# Altium PCB PiMX8MP_r0.3.PcbDoc (part 7 of 10)
Units mm, origin at the board's own origin, x right, y up, seen from the top; angles counter-clockwise.
Board outline 55 x 40 mm, 10 copper layers (Top Layer, Layer 1, Layer 2, Layer 3, Layer 4, Layer 5, Layer 6, Layer 7, Layer 8, Bottom Layer), stack 1.472 mm thick; 545 components, 477 nets, 2606 pads, 2278 vias.
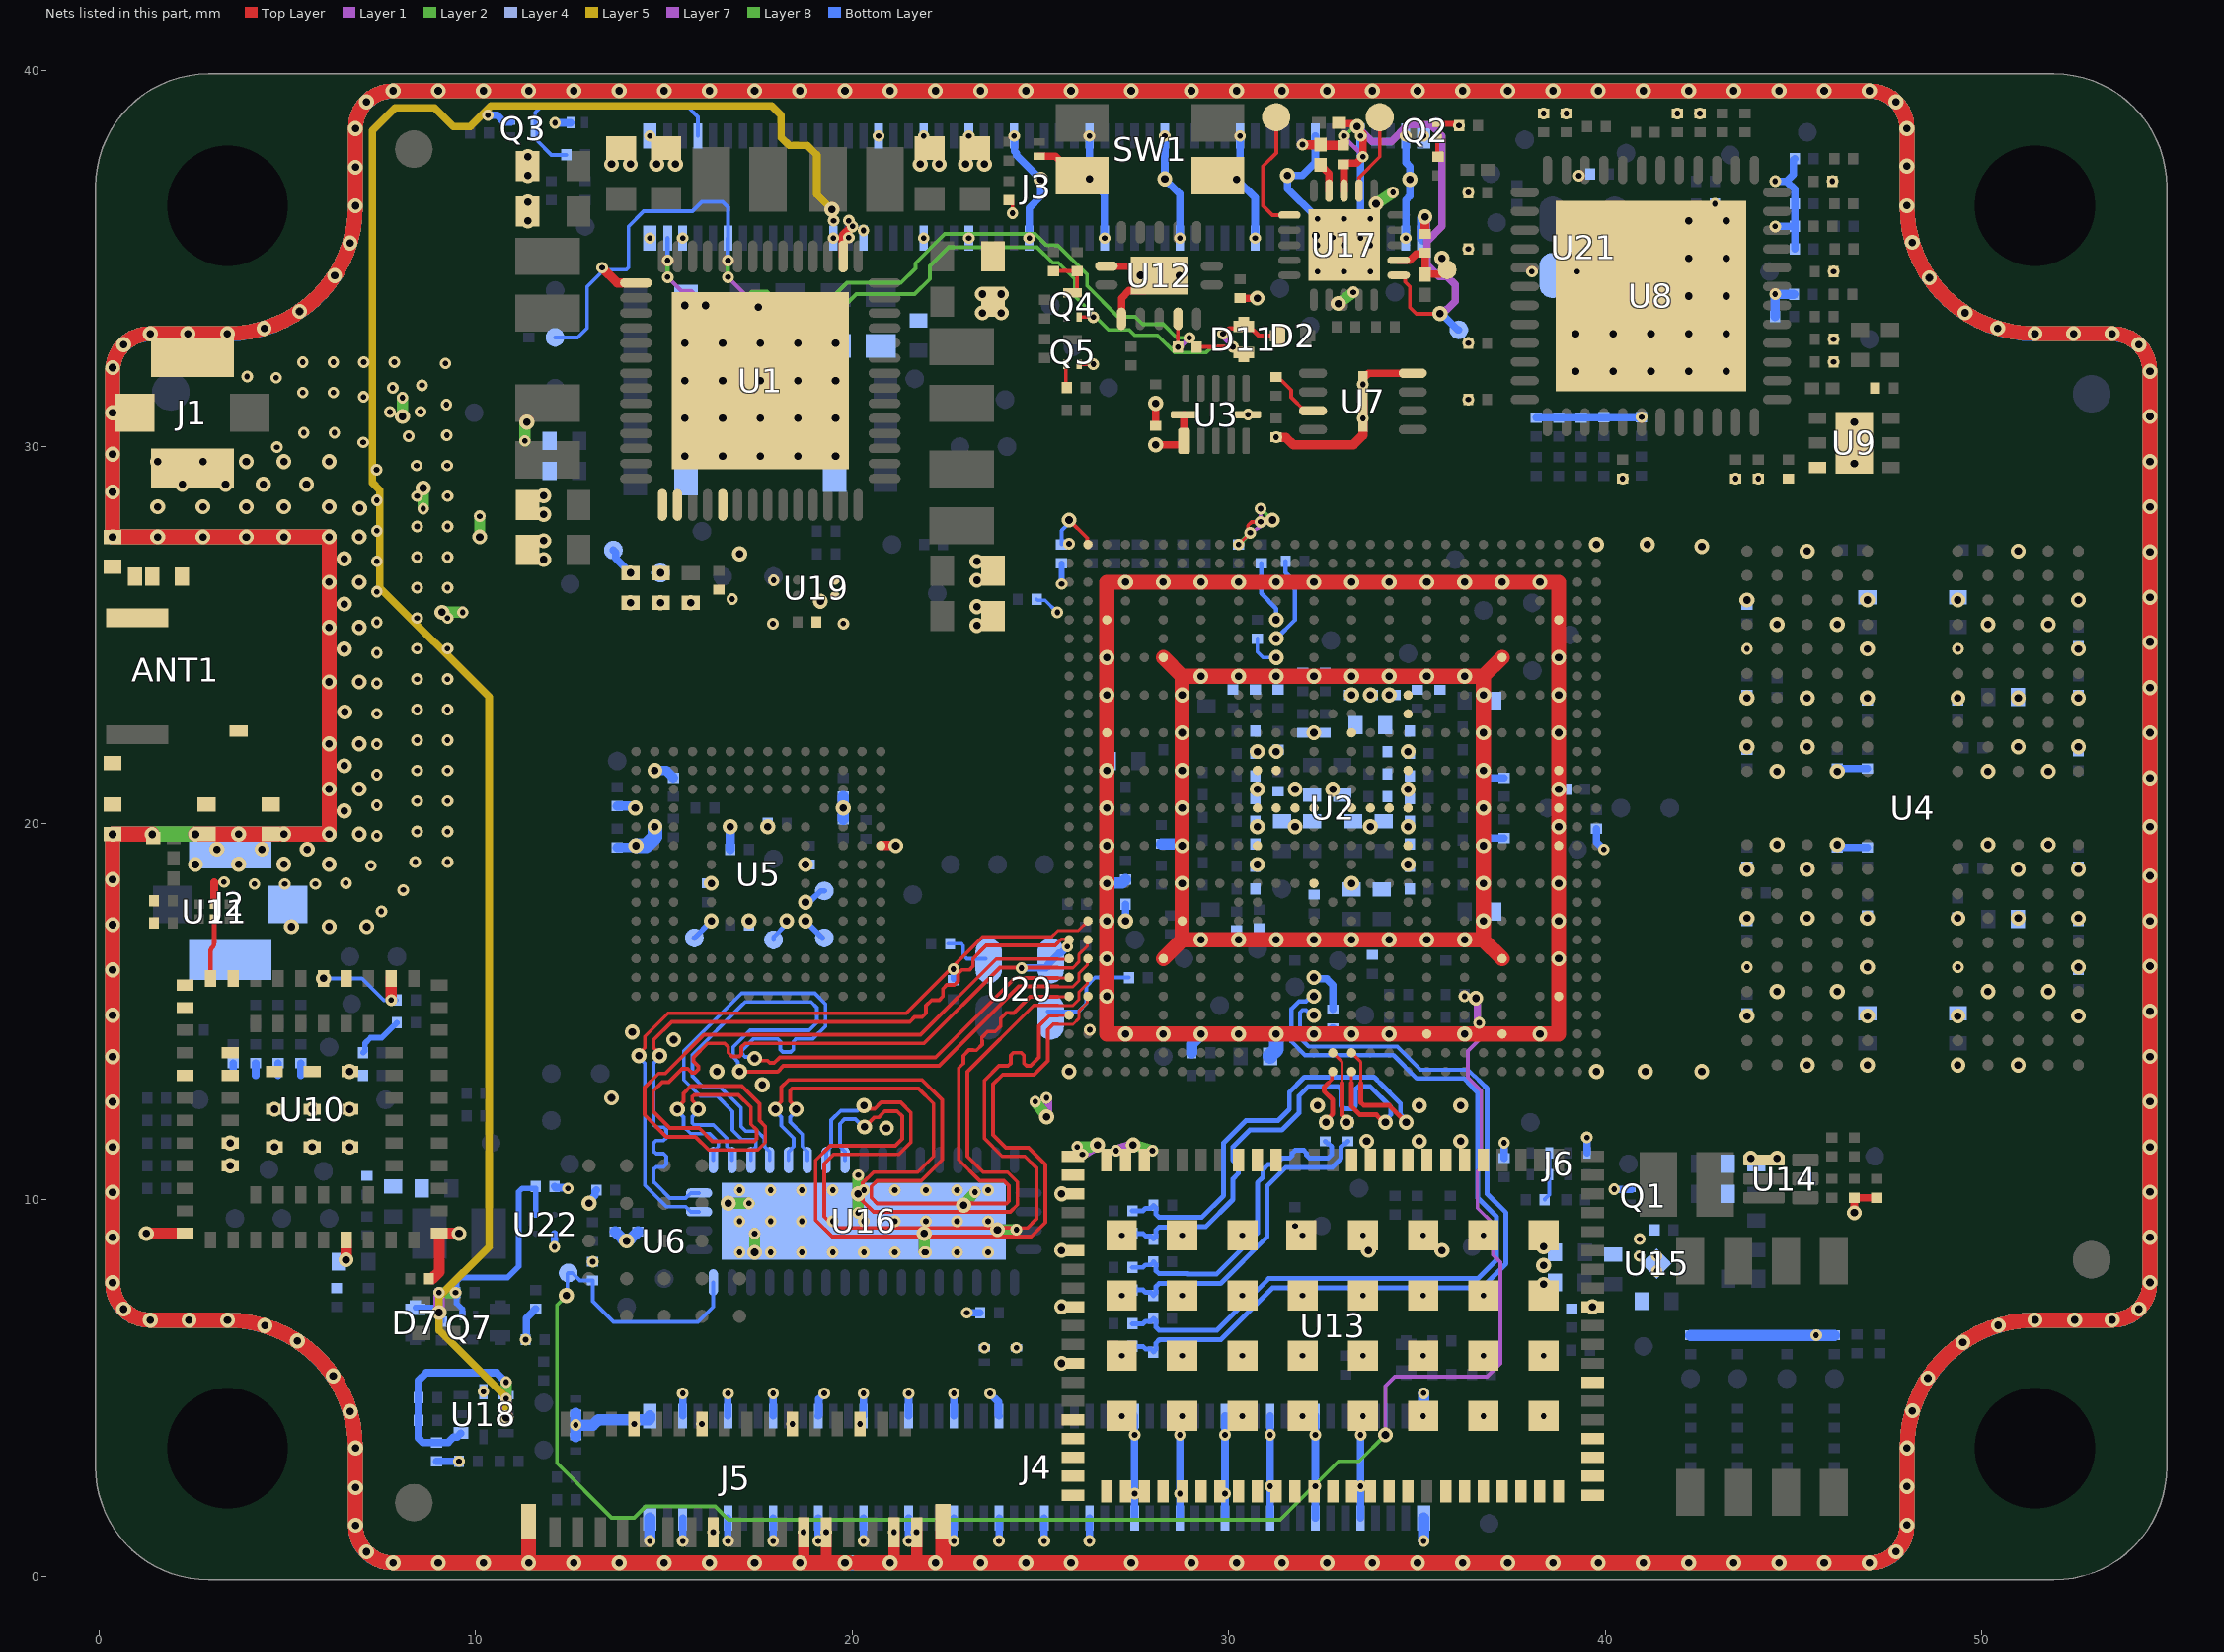
[diagram p15: the nets of this part, all layers, seen from the top]

## Via types
v1: diameter 0.4, hole 0.2, Top Layer to Bottom Layer, tented both sides, 946 vias
v2: diameter 0.31, hole 0.15, Top Layer to Layer 1, tented both sides, 321 vias
v3: diameter 0.31, hole 0.15, Layer 8 to Bottom Layer, tented both sides, 315 vias
v4: diameter 0.31, hole 0.15, Layer 1 to Layer 2, tented both sides, 257 vias
v5: diameter 0.31, hole 0.15, Layer 7 to Layer 8, tented both sides, 198 vias
v6: diameter 0.4, hole 0.2, Layer 2 to Layer 7, tented both sides, 169 vias
v7: diameter 0.31, hole 0.15, Top Layer to Layer 1, tented top, 72 vias

## Nets (pads, with @x,y where several pads share a name; then routed paths per layer and width w, separated by ;. In a path a pad name is that pad's centre, name@x,y a point inside that pad or via, vN(x,y) a via of type N, cw(c..) or ccw(c..) an arc to the next point about the centre after c; other vN are vias at no path point) (continued)
GND: C1.2 C2.2 C3.2 C4.2 C5.2 C6.2 C7.2 C8.2 C9.2 C10.2 C11.2 C12.2 C13.2 C14.2 C15.2 C16.2 C17.2 C18.2 C19.2 C20.2 C21.2 C22.2 C23.2 C24.2 C25.2 C26.2 C27.2 C28.2 C29.2 C30.2 C31.2 C32.2 C33.2 C34.2 C35.2 C36.2 C37.2 C38.2 C39.2 C40.2 C41.2 C42.2 C43.2 C44.2 C45.2 C46.2 C47.2 C48.2 C49.2 C50.2 C51.2 C52.2 C53.2 C54.2 C55.2 C56.2 C57.2 C58.2 C59.2 C60.2 C61.2 C62.2 C63.2 C64.2 C65.2 C66.2 C67.2 C68.2 C69.2 C70.2 C71.2 C72.2 C73.2 C74.2 C75.2 C76.2 C77.2 C78.2 C79.2 C80.2 C81.2 C82.2 C83.2 C84.2 C85.2 C86.2 C87.2 C88.2 C89.2 C90.2 C91.2 C92.2 C93.2 C94.2 C95.2 C96.2 C97.2 C98.2 C99.2 C100.2 C101.2 C102.2 C103.2 C104.2 C105.2 C106.2 C107.2 C108.2 C109.2 C114.2 C115.2 C116.2 C117.2 C118.2 C119.2 C120.2 C121.2 C122.2 C123.2 C124.2 C125.2 C126.2 C127.2 C128.2 C129.2 C130.2 C131.2 C132.2 C133.2 C134.2 C135.2 C136.2 C137.2 C138.2 C139.2 C140.2 C141.2 C142.2 C143.2 C144.2 C145.2 C146.2 C147.2 C148.2 C149.2 C150.2 C151.2 C152.2 C153.2 C154.2 C155.2 C156.2 C157.2 C158.2 C159.2 C160.2 C161.2 C162.2 C163.2 C164.2 C167.2 C168.1 C169.2 C172.2 C173.2 C174.2 C175.2 C176.2 C177.2 C178.2 C179.2 C180.2 C181.2 C182.2 C183.2 C184.2 C185.2 C187.2 C188.2 C189.2 C190.2 C191.2 C192.2 C193.2 C194.2 C195.2 C196.2 C197.2 C198.2 D1.1 D3.2 D5.2 D6.2 D8.2 D9.2 J1.2 J2.2 J3.1 J3.2 J3.7 J3.8 J3.13 J3.14 J3.22 J3.23 J3.32 J3.33 J3.42 J3.43 J3.52 J3.53 J3.59 J3.60 J3.65 J3.66 J3.71 J3.74 J3.98 J3.MT J4.7 J4.8 J4.13 J4.14 J4.19 J4.20 J4.25 J4.26 J4.31 J4.32 J4.37 J4.38 J4.44 J4.50 J4.55 J4.56 J4.61 J4.62 J4.67 J4.68 J4.73 J4.74 J4.79 J4.80 J4.85 J4.86 J4.91 J4.92 J4.97 J4.98 J4.MT J5.1 J5.3 J5.6 J5.9 J5.11 J5.12 J5.19 J5.20 J5.26 J5.MT J6.4 L13.1 L15.2 Q1.2 Q2.2 Q3.2 Q4.2 Q5.2 R6.2 R10.1 R11.1 R25.2 R26.1 R27.1 R28.1 R29.1 R30.1 R39.2 R41.2 R46.2 R47.2 R49.1 R50.1 R52.1 R53.1 R61.1 R84.1 R85.1 R86.1 R87.1 R88.1 R89.1 R91.2 R99.1 R100.1 R101.1 R102.1 R103.1 R104.1 R117.1 R118.1 R123.1 R124.1 R125.1 R128.1 R132.1 R134.1 R148.1 R152.2 R167.1 R168.2 R184.1 SW1.1 U1.5 U1.30 U1.43 U1.57 U2.A1 U2.A29 U2.AA3 U2.AA7 U2.AA23 U2.AA27 U2.AB8 U2.AB10 U2.AB12 U2.AB14 U2.AB16 U2.AB18 U2.AB20 U2.AB22 U2.AC3 U2.AC6 U2.AC24 U2.AC27 U2.AE3 U2.AE27 U2.AG4 U2.AG6 U2.AG8 U2.AG10 U2.AG12 U2.AG14 U2.AG16 U2.AG18 U2.AG20 U2.AG22 U2.AG24 U2.AG26 U2.AJ1 U2.AJ29 U2.C4 U2.C6 U2.C8 U2.C10 U2.C12 U2.C14 U2.C16 U2.C18 U2.C20 U2.C22 U2.C24 U2.C26 U2.E3 U2.E27 U2.G3 U2.G6 U2.G24 U2.G27 U2.H8 U2.H10 U2.H12 U2.H14 U2.H16 U2.H18 U2.H20 U2.H22 U2.J3 U2.J7 U2.J23 U2.J27 U2.L3 U2.L7 U2.L14 U2.L16 U2.L23 U2.L27 U2.M11 U2.M19 U2.N3 U2.N7 U2.N11 U2.N19 U2.N23 U2.N27 U2.P11 U2.P19 U2.R3 U2.R7 U2.R11 U2.R12 U2.R13 U2.R14 U2.R16 U2.R17 U2.R18 U2.R19 U2.R23 U2.R27 U2.T11 U2.T19 U2.U3 U2.U7 U2.U11 U2.U18 U2.U19 U2.U23 U2.U27 U2.V11 U2.V19 U2.W3 U2.W7 U2.W14 U2.W16 U2.W23 U2.W27 U3.6 U4.A3 U4.A10 U4.AB3 U4.AB5 U4.AB8 U4.AB10 U4.C1 U4.C5 U4.C8 U4.C12 U4.D2 U4.D4 U4.D9 U4.D11 U4.E1 U4.E5 U4.E8 U4.E12 U4.G1 U4.G3 U4.G5 U4.G8 U4.G10 U4.G12 U4.J1 U4.J3 U4.J10 U4.J12 U4.K2 U4.K4 U4.K9 U4.K11 U4.N2 U4.N4 U4.N9 U4.N11 U4.P1 U4.P3 U4.P10 U4.P12 U4.T1 U4.T3 U4.T5 U4.T8 U4.T10 U4.T12 U4.V1 U4.V5 U4.V8 U4.V12 U4.W2 U4.W4 U4.W9 U4.W11 U4.Y1 U4.Y5 U4.Y8 U4.Y12 U5.A6 U5.C4 U5.E7 U5.G5 U5.H10 U5.J5 U5.K8 U5.N2 U5.N5 U5.P4 U5.P6 U6.B3 U7.4 U7.9 U8.49 U9.3 U9.7 U10.1 U10.14 U10.16 U10.21 U10.23 U10.24 U10.27 U10.34 U10.41 U10.57 U10.58 U10.61 U10.62 U10.69 U10.70 U10.71 U10.72 U10.73 U10.74 U10.75 U10.76 U10.77 U11.2 U12.7 U12.9 U12.15 U13.1 U13.2 U13.3 U13.6 U13.9 U13.12 U13.15 U13.16 U13.17 U13.18 U13.19 U13.20 U13.21 U13.22 U13.23 U13.24 U13.25 U13.26 U13.27 U13.28 U13.29 U13.30 U13.31 U13.32 U13.33 U13.34 U13.35 U13.36 U13.38 U13.39 U13.40 U13.41 U13.42 U13.43 U13.44 U13.45 U13.46 U13.47 U13.48 U13.51 U13.55 U13.68 U13.69 U13.70 U13.71 U13.72 U13.73 U13.74 U13.75 U13.79 U13.80 U13.81 U13.86 U13.87 U13.88 U13.89 U13.90 U13.91 U13.92 U13.93 U13.94 U13.95 U13.96 U13.97 U13.98 U13.99 U13.100 U13.101 U13.102 U13.103 U13.104 U13.105 U13.106 U13.107 U13.108 U13.109 U13.110 U13.111 U13.112 U13.113 U13.114 U13.115 U13.116 U13.117 U13.118 U13.119 U13.120 U14.4 U15.2 U15.5 U16.43 U17.21 U18.4 U19.1 U19.4 U20.2 U21.2 U22.B1 | length 1334.1
  Top Layer w0.1: v2(24.262,36.204) R6.2@24.262,36.554 ; Q5.2@26.028,32.194 v2(26.407,32.194) ; Q4.2@26.028,33.444 v2(26.407,33.444)
  Top Layer w0.15: Q2.2@35.537,38.579 36.067,38.579 v2(36.117,38.529)
  Top Layer w0.2: U11.2@3.062,17.854 3.062,18.435 ; D1.1@24.962,37.714 25.402,37.714 25.912,37.204 SW1.1@26.112,37.204 ; U12.7@26.753,34.799 U12.15@27.903,34.799 ; U12.9@27.153,33.399 27.153,33.945 27.356,34.149 U12.15@27.753,34.149 ; C107.2@28.062,30.554 v1(28.062,31.154) ; C195.2@30.303,33.949 v1(30.756,33.949) ; U7.9@33.562,31.204 33.562,31.879 33.587,31.904 33.662,31.904 33.712,31.954 U7.4@34.887,31.954 ; v1(46.612,9.654) C189.2@46.612,10.054 R132.1@47.212,10.054
  Top Layer w0.25: v2(13.362,34.754) 13.763,34.354 U1.43@14.262,34.354 ; U1.30@19.762,35.054 19.762,35.604 v2@20.001,35.843 ; U5.A6@20.762,19.404 v1(21.162,19.404) ; C148.2@31.237,30.264 31.252,30.264 v2(31.262,30.254) 31.272,30.244 31.522,30.244 31.712,30.054 33.312,30.054 33.562,30.304 U7.9@33.562,31.204 ; v2(31.962,38.024) L13.1@32.437,38.024 32.457,38.004 C193.2@33.037,38.004 ; C194.2@35.212,35.654 v1(35.212,36.104)
  Top Layer w0.3: v1(1.262,9.104) U10.34@2.287,9.104 ; v1(6.562,8.404) U10.41@6.562,8.929 ; v7(7.762,15.304) U10.14@7.762,15.879 ; C180.2@8.85,7.9 9.037,8.087 U10.1@9.037,9.104 v1(9.562,9.104) ; v1@18.712,0.354 v2(18.712,1.171) ; 19.312,0.354 v2(19.312,1.171) ; v1@19.912,0.351 20.112,0.351 ; v1@21.112,0.354 v2(21.112,1.171) ; 21.712,0.354 v2(21.712,1.171)
  Top Layer w0.4: v1(0.362,19.704) v1(0.362,18.504) v1(0.362,17.304) v1(0.362,16.104) v1(0.362,14.904) v1(0.362,13.801) v1(0.362,12.601) v1(0.362,11.401) v1(0.362,10.201) v1(0.362,9.001) v1(0.362,7.801) ccw(c1.362,7.801) 1.362,6.801 3.412,6.801 cw(c3.412,3.401) 6.812,3.401 6.812,1.351 ccw(c7.812,1.351) 7.812,0.351 v1@19.912,0.351 ; C168.1@0.362,19.709 L15.2@1.407,19.709 ; v1@2.567,19.709 C173.2@2.862,19.709 v1(3.712,19.709) v1(4.912,19.709) v1(6.112,19.709) v1(6.112,20.909) v1(6.112,22.109) v1(6.112,23.754) v1(6.112,25.204) v1(6.112,26.404) v1(6.112,27.604) v1(4.912,27.604) v1(3.912,27.604) v1(2.762,27.604) v1(1.562,27.604) v1(0.362,27.604) v1(0.362,30.903) 0.362,32.004 cw(c1.362,32.004) 1.362,33.004 3.412,33.004 ccw(c3.412,36.404) 6.812,36.404 6.812,38.454 cw(c7.812,38.454) v1(7.812,39.454) v1(47.012,39.454) cw(c47.012,38.454) 48.012,38.454 48.012,36.404 ccw(c51.412,36.404) 51.412,33.004 53.462,33.004 cw(c53.462,32.004) v1(54.462,32.004) v1(54.462,19.904) v1(54.462,7.804) cw(c53.462,7.804) 53.462,6.804 51.412,6.804 ccw(c51.412,3.404) 48.012,3.404 48.012,1.354 cw(c47.012,1.354) v1(47.012,0.354) ; v1(11.412,0.354) J5.MT@11.412,1.446 ; 20.112,0.351 v1@47.012,0.351 ; 22.412,0.354 J5.MT@22.412,1.446 ; U2.G24@28.262,16.404 28.762,16.904 ; U2.AC24@28.262,24.404 28.762,23.904 ; U2.G6@37.262,16.404 36.762,16.904 ; U2.AC6@37.262,24.404 36.762,23.904 ; 28.762,16.904 U2.J23@28.762,17.404 v1(28.762,18.404) v1(28.762,19.404) v1(28.762,20.404) v1(28.762,21.404) v1(28.762,22.404) v1(28.762,23.404) 28.762,23.904 ; 28.762,16.904 v1(29.262,16.904) v1(31.262,16.904) v1(32.262,16.904) v1(33.262,16.904) v1(34.262,16.904) v1(35.262,16.904) v1(36.262,16.904) 36.762,16.904 ; 28.762,23.904 v1(29.262,23.904) v1(30.262,23.904) v1(31.262,23.904) v1(32.262,23.904) v1(33.262,23.904) v1(34.262,23.904) v1(35.262,23.904) v1(36.262,23.904) 36.762,23.904 ; 36.762,16.904 v1(36.762,18.404) v1(36.762,19.404) v1(36.762,20.404) v1(36.762,22.404) v1(36.762,23.404) 36.762,23.904 ; 26.762,14.404 v1(27.262,14.404) v1(28.262,14.404) v1(29.262,14.404) v1(30.262,14.404) v1(31.262,14.404) v1(32.262,14.404) v1(33.262,14.404) v1(34.262,14.404) U2.C10@35.262,14.404 v1(36.262,14.404) U2.C6@37.262,14.404 v1(38.262,14.404) 38.762,14.404 U2.E3@38.762,15.404 v1(38.762,16.404) v1(38.762,17.404) v1(38.762,18.404) U2.N3@38.762,19.404 v1(38.762,19.904) U2.R3@38.762,20.404 v1(38.762,20.904) U2.U3@38.762,21.404 v1(38.762,22.404) v1(38.762,23.404) v1(38.762,24.404) U2.AE3@38.762,25.404 38.762,26.404 v1(38.262,26.404) v1(37.262,26.404) v1(36.262,26.404) v1(35.262,26.404) v1(34.262,26.404) v1(33.262,26.404) v1(31.262,26.404) v1(30.262,26.404) v1(29.262,26.404) v1(28.262,26.404) v1(27.262,26.404) 26.762,26.404 26.762,14.404
  Layer 1 w0.1: v2(26.407,32.194) v2@26.412,32.194
  Layer 2 w0.3: v6(8.062,30.804) v4(8.062,31.304) ; v4(8.612,28.354) v6(8.612,28.904) ; v6(9.112,25.604) v4(9.662,25.604) ; v6(10.112,27.604) v4(10.112,28.154) ; v4@11.312,30.157 11.312,30.577 11.362,30.627 v6(11.362,30.654) ; v6(16.712,9.904) v4(17.262,9.904) ; v6(17.412,8.604) v4(17.412,9.104) ; v1@19.912,0.351 20.112,0.351 ; v4(20.162,9.654) v6(20.162,10.154) v4(20.162,10.654) ; v4(21.912,8.604) v6(21.912,9.104) ; v6(22.962,9.854) v4(23.262,10.204) ; v6(23.862,9.204) v4(24.362,9.204) ; v4(24.862,12.604) v6(25.162,12.204) ; v4(25.979,11.404) 26.312,11.404 v6(26.512,11.454) ; v6(27.462,11.454) v4(27.979,11.304) ; v6(32.312,35.604) v4(32.762,35.554) ; v6(32.912,33.804) v4(33.312,34.104) ; v6(33.912,36.454) v4(34.362,36.754)
  Layer 2 w0.4: v1(0.362,19.704) v1(0.362,18.504) v1(0.362,17.304) v1(0.362,16.104) v1(0.362,14.904) v1(0.362,13.801) v1(0.362,12.601) v1(0.362,11.401) v1(0.362,10.201) v1(0.362,9.001) v1(0.362,7.801) ccw(c1.362,7.801) 1.362,6.801 3.412,6.801 cw(c3.412,3.401) 6.812,3.401 6.812,1.351 ccw(c7.812,1.351) 7.812,0.351 v1@19.912,0.351 ; v1@0.362,19.709 2.567,19.709 v1(3.712,19.709) v1(4.912,19.709) v1(6.112,19.709) v1(6.112,20.909) v1(6.112,22.109) v1(6.112,23.754) v1(6.112,25.204) v1(6.112,26.404) v1(6.112,27.604) v1(4.912,27.604) v1(3.912,27.604) v1(2.762,27.604) v1(1.562,27.604) v1(0.362,27.604) v1(0.362,30.903) 0.362,32.004 cw(c1.362,32.004) 1.362,33.004 3.412,33.004 ccw(c3.412,36.404) 6.812,36.404 6.812,38.454 cw(c7.812,38.454) v1(7.812,39.454) v1(47.012,39.454) cw(c47.012,38.454) 48.012,38.454 48.012,36.404 ccw(c51.412,36.404) 51.412,33.004 53.462,33.004 cw(c53.462,32.004) v1(54.462,32.004) v1(54.462,19.904) v1(54.462,7.804) cw(c53.462,7.804) 53.462,6.804 51.412,6.804 ccw(c51.412,3.404) 48.012,3.404 48.012,1.354 cw(c47.012,1.354) v1(47.012,0.354) ; 20.112,0.351 v1@47.012,0.351
  Layer 4 w0.4: v1(0.362,19.704) v1(0.362,18.504) v1(0.362,17.304) v1(0.362,16.104) v1(0.362,14.904) v1(0.362,13.801) v1(0.362,12.601) v1(0.362,11.401) v1(0.362,10.201) v1(0.362,9.001) v1(0.362,7.801) ccw(c1.362,7.801) 1.362,6.801 3.412,6.801 cw(c3.412,3.401) 6.812,3.401 6.812,1.351 ccw(c7.812,1.351) 7.812,0.351 v1@24.612,0.351 ; v1@0.362,19.709 2.567,19.709 v1(3.712,19.709) v1(4.912,19.709) v1(6.112,19.709) v1(6.112,20.909) v1(6.112,22.109) v1(6.112,23.754) v1(6.112,25.204) v1(6.112,26.404) v1(6.112,27.604) v1(4.912,27.604) v1(3.912,27.604) v1(2.762,27.604) v1(1.562,27.604) v1(0.362,27.604) v1(0.362,30.903) 0.362,32.004 cw(c1.362,32.004) 1.362,33.004 3.412,33.004 ccw(c3.412,36.404) 6.812,36.404 6.812,38.454 cw(c7.812,38.454) v1(7.812,39.454) v1(47.012,39.454) cw(c47.012,38.454) 48.012,38.454 48.012,36.404 ccw(c51.412,36.404) 51.412,33.004 53.462,33.004 cw(c53.462,32.004) v1(54.462,32.004) v1(54.462,19.904) v1(54.462,7.804) cw(c53.462,7.804) 53.462,6.804 51.412,6.804 ccw(c51.412,3.404) 48.012,3.404 48.012,1.354 cw(c47.012,1.354) v1(47.012,0.354) v1(24.612,0.354)
  Layer 5 w0.3: v1@19.912,0.351 20.112,0.351
  Layer 5 w0.4: v1(0.362,19.704) v1(0.362,18.504) v1(0.362,17.304) v1(0.362,16.104) v1(0.362,14.904) v1(0.362,13.801) v1(0.362,12.601) v1(0.362,11.401) v1(0.362,10.201) v1(0.362,9.001) v1(0.362,7.801) ccw(c1.362,7.801) 1.362,6.801 3.412,6.801 cw(c3.412,3.401) 6.812,3.401 6.812,1.351 ccw(c7.812,1.351) 7.812,0.351 v1@19.912,0.351 ; v1@0.362,19.709 2.567,19.709 v1(3.712,19.709) v1(4.912,19.709) v1(6.112,19.709) v1(6.112,20.909) v1(6.112,22.109) v1(6.112,23.754) v1(6.112,25.204) v1(6.112,26.404) v1(6.112,27.604) v1(4.912,27.604) v1(3.912,27.604) v1(2.762,27.604) v1(1.562,27.604) v1(0.362,27.604) v1(0.362,30.903) 0.362,32.004 cw(c1.362,32.004) 1.362,33.004 3.412,33.004 ccw(c3.412,36.404) 6.812,36.404 6.812,38.454 cw(c7.812,38.454) v1(7.812,39.454) v1(47.012,39.454) cw(c47.012,38.454) 48.012,38.454 48.012,36.404 ccw(c51.412,36.404) 51.412,33.004 53.462,33.004 cw(c53.462,32.004) v1(54.462,32.004) v1(54.462,19.904) v1(54.462,7.804) cw(c53.462,7.804) 53.462,6.804 51.412,6.804 ccw(c51.412,3.404) 48.012,3.404 48.012,1.354 cw(c47.012,1.354) v1(47.012,0.354) ; 20.112,0.351 v1@47.012,0.351
  Layer 7 w0.3: v1@19.912,0.351 20.112,0.351 ; v6(25.162,12.204) v5(25.162,12.704) ; v5(26.112,11.204) v6(26.512,11.454) ; v5(27.012,11.304) v6(27.462,11.454)
  Layer 7 w0.4: v1(0.362,19.704) v1(0.362,18.504) v1(0.362,17.304) v1(0.362,16.104) v1(0.362,14.904) v1(0.362,13.801) v1(0.362,12.601) v1(0.362,11.401) v1(0.362,10.201) v1(0.362,9.001) v1(0.362,7.801) ccw(c1.362,7.801) 1.362,6.801 3.412,6.801 cw(c3.412,3.401) 6.812,3.401 6.812,1.351 ccw(c7.812,1.351) 7.812,0.351 v1@19.912,0.351 ; v1@0.362,19.709 v1@1.407,19.709 ; v1@2.567,19.709 v1(3.712,19.709) v1(4.912,19.709) v1(6.112,19.709) v1(6.112,20.909) v1(6.112,22.109) v1(6.112,23.754) v1(6.112,25.204) v1(6.112,26.404) v1(6.112,27.604) v1(4.912,27.604) v1(3.912,27.604) v1(2.762,27.604) v1(1.562,27.604) v1(0.362,27.604) v1(0.362,30.903) 0.362,32.004 cw(c1.362,32.004) 1.362,33.004 3.412,33.004 ccw(c3.412,36.404) 6.812,36.404 6.812,38.454 cw(c7.812,38.454) v1(7.812,39.454) v1(47.012,39.454) cw(c47.012,38.454) 48.012,38.454 48.012,36.404 ccw(c51.412,36.404) 51.412,33.004 53.462,33.004 cw(c53.462,32.004) v1(54.462,32.004) v1(54.462,19.904) v1(54.462,7.804) cw(c53.462,7.804) 53.462,6.804 51.412,6.804 ccw(c51.412,3.404) 48.012,3.404 48.012,1.354 cw(c47.012,1.354) v1(47.012,0.354) ; 20.112,0.351 v1@47.012,0.351
  Bottom Layer w0.1: R25.2@24.9,25.95 24.926,25.924 25.126,25.924 v3(25.45,25.6)
  Bottom Layer w0.15: R117.1@7.012,13.904 7.064,13.956 7.064,14.156 7.212,14.304 7.512,14.304 7.837,14.629 7.852,14.629 7.912,14.689 R184.1@7.912,14.704 ; v3(25.562,26.354) R41.2@25.562,26.904
  Bottom Layer w0.2: 3.562,13.304 R118.1@3.562,13.629 ; 4.162,13.304 R123.1@4.162,13.629 ; 4.762,13.304 R125.1@4.762,13.629 ; 5.362,13.304 R124.1@5.362,13.629 ; C197.2@8.962,3.054 v3(9.562,3.054) ; v3(10.328,38.804) 10.578,38.804 10.753,38.629 Q3.2@10.937,38.629 ; R167.1@11.35,6.25 11.35,6.85 11.55,7.05 11.55,7.065 11.585,7.1 R168.2@11.6,7.1 ; v3(12.1,8.75) U22.B1@12.1,9.1 ; C106.2@12.1,10.35 12.129,10.321 12.429,10.321 v3(12.45,10.3) ; v3@12.122,38.614 v3(12.112,38.604) D3.2@12.522,38.604 ; v3(15.502,0.939) J4.98@15.502,1.544 ; J4.97@15.502,4.254 v3(15.502,4.854) ; v3(16.702,0.939) J4.92@16.702,1.544 ; J4.91@16.702,4.254 v3(16.702,4.854) ; v3(17.902,0.939) J4.86@17.902,1.544 ; J4.85@17.902,4.254 v3(17.902,4.854) ; v3(19.102,0.939) J4.80@19.102,1.544 ; J4.79@19.102,4.254 19.117,4.269 19.117,4.709 v3(19.262,4.854) ; v3(20.302,0.939) J4.74@20.302,1.544 ; J4.73@20.302,4.254 v3(20.302,4.854) ; v3(21.502,0.939) J4.68@21.502,1.544 ; J4.67@21.502,4.254 v3(21.502,4.854) ; v1(21.812,37.504) 21.812,37.559 21.902,37.649 v3(21.902,38.254) ; v3(22.691,16.129) 22.712,16.108 22.712,15.875 C30.2@22.719,15.867 ; v3(22.702,0.939) J4.62@22.702,1.544 ; J4.61@22.702,4.254 v3(22.702,4.854) ; v1(23.012,37.504) 23.012,37.559 23.102,37.649 v3(23.102,38.254) ; v3(23.05,7) C192.2@23.4,7 ; v3(23.662,4.854) 23.887,4.629 23.887,4.269 J4.55@23.902,4.254 ; v3(23.902,0.939) J4.56@23.902,1.544 ; v3(24.302,38.254) 24.317,38.239 24.317,37.852 24.367,37.802 24.367,37.749 v1(25.012,37.104) 25.012,36.654 24.702,36.344 v3(24.702,35.544) ; v3(24.499,16.154) U20.2@25.154,16.154 ; v3(25.102,0.939) J4.50@25.102,1.544 ; U20.2@25.2,16.2 25.2,16.25 25.5,16.55 25.544,16.55 25.717,16.722 v3(25.717,16.724) ; v3(26.302,0.939) J4.44@26.302,1.544 ; v3(26.302,38.254) v1(26.302,37.114) 26.702,36.714 v3(26.702,35.544) ; J4.38@27.502,1.544 v3(27.502,2.194) v3(27.502,3.754) J4.37@27.502,4.254 ; v3(28.302,38.254) v1(28.302,37.114) 28.702,36.714 v3(28.702,35.544) ; J4.32@28.702,1.544 v3(28.702,2.194) v3(28.702,3.754) J4.31@28.702,4.254 ; J4.26@29.902,1.544 v3(29.902,2.194) v3(29.902,3.754) J4.25@29.902,4.254 ; v3(30.302,38.254) 30.302,37.444 30.241,37.383 30.241,37.133 v1(30.212,37.104) 30.702,36.614 v3(30.702,35.544) ; J4.20@31.102,1.544 v3(31.102,2.394) v3(31.102,3.754) J4.19@31.102,4.254 ; v1(32.262,14.404) 32.597,14.404 32.747,14.554 R39.2@32.762,14.554 R39.2@32.777,14.554 ; J4.14@32.302,1.544 v3(32.302,2.394) v3(32.302,3.754) J4.13@32.302,4.254 ; J3.14@32.302,35.544 32.302,36.114 31.562,36.854 v1(31.562,37.204) 31.954,37.204 32.257,37.507 32.257,37.509 32.302,37.554 J3.13@32.302,38.254 ; J4.8@33.502,1.544 v3(33.502,2.394) v3(33.502,3.754) J4.7@33.502,4.254 ; v3(33.502,35.544) v3(33.502,38.254) ; v3(34.702,35.544) 34.702,36.554 34.812,36.664 v1(34.812,37.104) 34.812,37.444 34.702,37.554 v3(34.702,38.254) ; C94.2@36.762,19.604 C77.2@37.312,19.604 ; C95.2@36.762,21.204 C70.2@37.312,21.204 ; C198.2@37.312,11.105 v3(37.312,11.514) ; R99.1@38.162,30.774 R100.1@38.762,30.774 R103.1@39.362,30.774 40.952,30.774 v3(40.962,30.784) ; J6.4@39.512,11.245 v3(39.512,11.654) ; R11.1@39.762,19.854 39.762,19.504 v3(39.962,19.304) ; v3(40.237,10.279) Q1.2@40.687,10.279 ; v3(44.512,35.854) R89.1@45.032,35.854 ; v3(44.512,37.054) 44.812,37.054 ; R88.1@45.032,35.254 R89.1@45.032,35.854 ; R85.1@45.032,37.654 44.997,37.619 44.997,37.239 44.812,37.054 ; v1(46.162,19.429) 46.237,19.354 R52.1@46.962,19.354 ; v1(46.162,21.379) 46.237,21.454 R49.1@46.962,21.454 ; 44.812,37.054 45.032,36.834 R84.1@45.032,36.454 R89.1@45.032,35.854
  Bottom Layer w0.25: C142.2@13.762,19.354 14.172,19.354 14.222,19.404 v1(14.262,19.404) ; C144.2@13.762,20.454 14.151,20.454 14.201,20.404 v1(14.242,20.404) ; v1@14.762,21.364 v1(14.762,21.404) 14.769,21.398 15.069,21.398 15.237,21.229 15.237,21.214 15.247,21.204 C145.2@15.262,21.204 ; R61.1@16.762,19.304 v1(16.762,19.904) ; R86.1@44.512,33.454 v3(44.512,34.054) R87.1@45.012,34.054
  Bottom Layer w0.3: D8.2@12.662,3.704 v3(12.662,4.014) ; D9.2@12.662,4.324 v3(12.662,4.014) ; C146.2@13.712,9.154 13.912,8.954 13.935,8.954 13.985,8.904 v1(14.012,8.904) 14.039,8.904 14.089,8.954 14.112,8.954 C147.2@14.312,9.154 ; v3(14.627,0.939) J4.MT@14.627,1.544 ; J4.MT@14.627,4.254 14.627,4.179 14.602,4.154 13.262,4.154 13.122,4.014 v3(12.662,4.014) ; C143.2@19.762,20.104 v1(19.762,20.404) C141.2@19.762,20.704 ; v1(26.762,18.404) 26.769,18.411 27.169,18.411 C71.2@27.262,18.504 ; C72.2@28.212,19.454 28.685,19.454 28.735,19.404 v1(28.762,19.404) ; R30.1@29.012,13.904 29.012,14.127 29.262,14.377 v1(29.262,14.404) ; v3(35.177,0.939) J4.MT@35.177,1.544 ; J4.MT@35.177,4.254 v3(35.177,4.859) ; R29.1@42.262,6.4 R28.1@43.517,6.4 R26.1@46.086,6.4
  Bottom Layer w0.35: J3.MT@35.177,35.544 35.177,36.069 v1(35.212,36.104)
  Bottom Layer w0.4: v1@0.362,19.699 0.362,7.796 ccw(c1.362,7.796) 1.362,6.796 3.412,6.796 cw(c3.412,3.396) 6.812,3.396 6.812,1.346 ccw(c7.812,1.346) v1@7.812,0.346 ; v1(0.362,19.704) v1@1.407,19.704 ; J2.2@2.567,19.704 6.112,19.704 6.112,23.749 6.112,27.599 0.362,27.599 0.362,31.999 cw(c1.362,31.999) v1(1.362,33.001) v1(3.412,33.001) ccw(c3.412,36.399) 6.812,36.399 6.812,38.449 cw(c7.812,38.449) 7.812,39.449 47.012,39.449 cw(c47.012,38.449) 48.012,38.449 48.012,36.399 ccw(c51.412,36.399) 51.412,32.999 53.462,32.999 cw(c53.462,31.999) 54.462,31.999 54.462,7.799 cw(c53.462,7.799) 53.462,6.799 51.412,6.799 ccw(c51.412,3.399) 48.012,3.399 48.012,1.349 cw(c47.012,1.349) 47.012,0.349 11.412,0.349 v1@7.817,0.349 ; v1(14.262,19.404) 14.528,19.404 14.762,19.639 v1(14.762,19.904) ; C69.2@31.102,13.804 31.102,13.834 31.262,13.994 v1(31.262,14.404)
  other v1: 7.812,0.354 9.012,0.354 10.212,0.354 12.612,0.354 13.812,0.354 15.012,0.354 16.212,0.354 17.412,0.354 18.612,0.354 19.812,0.354 21.012,0.354 22.212,0.354 23.412,0.354 25.812,0.354 27.412,0.354 29.012,0.354 30.212,0.354 31.412,0.354 32.612,0.354 33.812,0.354 35.012,0.354 36.212,0.354 37.412,0.354 38.612,0.354 39.812,0.354 41.012,0.354 42.212,0.354 43.412,0.354 44.612,0.354 45.812,0.354 7.105,0.647 47.719,0.651 6.816,1.354 48.012,1.358 6.816,2.354 48.012,2.383 6.816,3.404 48.012,3.408 6.671,4.38 48.156,4.394 48.564,5.263 6.221,5.32 25.562,5.654 49.497,6.213 5.271,6.253 4.402,6.661 50.437,6.663 1.366,6.804 2.391,6.804 3.416,6.804 51.412,6.808 52.462,6.808 53.462,6.808 0.659,7.097 54.169,7.097 25.562,7.154 39.662,7.154 38.362,7.754 38.362,8.254 25.562,8.654 38.362,8.754 54.462,9.004 25.562,10.154 54.462,10.204 3.487,10.904 43.862,11.104 44.562,11.104 4.662,11.404 5.662,11.404 6.662,11.404 54.462,11.404 3.487,11.504 33.662,11.554 35.062,11.554 36.162,11.554 20.912,11.904 4.662,12.404 5.662,12.404 6.662,12.404 32.362,12.504 35.062,12.504 36.162,12.504 54.462,12.604 13.612,12.704 17.612,13.054 6.662,13.404 16.412,13.404 25.762,13.404 39.762,13.404 41.062,13.404 42.562,13.404 45.362,13.579 46.962,13.579 49.362,13.579 50.962,13.579 54.462,13.804 15.263,14.254 14.162,14.454 43.762,14.879 46.962,14.879 49.362,14.879 52.562,14.879 54.462,15.004 26.762,15.404 44.562,15.529 46.162,15.529 50.162,15.529 51.762,15.529 46.962,16.179 52.562,16.179 54.462,16.204 26.762,16.404 30.262,16.904 5.112,17.254 6.112,17.254 7.112,17.254 17.262,17.404 26.762,17.404 36.762,17.404 54.462,17.404 43.762,17.479 45.362,17.479 46.962,17.479 49.362,17.479 50.962,17.479 52.562,17.479 16.262,18.404 33.262,18.404 54.462,18.604 43.762,18.779 45.362,18.779 50.962,18.779 52.562,18.779 2.562,18.904 3.712,18.909 4.912,18.909 6.112,18.909 18.762,18.904 30.762,18.904 34.762,18.904 3.131,19.309 4.331,19.309 5.531,19.309 26.762,19.404 44.562,19.429 50.162,19.429 51.762,19.429 1.412,19.704 2.562,19.704 6.912,19.709 17.762,19.904 30.762,19.904 31.762,19.904 33.762,19.904 34.762,19.904 6.512,20.328 26.762,20.404 6.912,20.909 30.762,20.904 31.762,20.904 32.762,20.904 34.762,20.904 54.462,21.204 44.562,21.379 50.162,21.379 51.762,21.379 26.762,21.404 36.762,21.404 6.512,21.528 30.762,21.904 31.262,21.904 34.762,21.904 43.762,22.029 45.362,22.029 50.962,22.029 52.562,22.029 6.912,22.109 32.262,22.404 54.462,22.404 6.531,22.954 43.762,23.329 45.362,23.329 46.962,23.329 49.362,23.329 50.962,23.329 52.562,23.329 26.762,23.404 54.462,23.604 6.912,23.754 26.762,24.404 6.512,24.623 46.962,24.629 52.562,24.629 54.462,24.804 6.912,25.204 23.312,25.254 44.562,25.279 46.162,25.279 50.162,25.279 51.762,25.279 23.312,25.754 6.512,25.823 14.112,25.859 14.912,25.859 15.712,25.859 19.158,25.897 43.762,25.929 46.962,25.929 49.362,25.929 52.562,25.929 54.462,26.004 6.912,26.404 32.262,26.404 23.312,26.454 23.312,26.954 11.812,27.004 6.512,27.023 17.012,27.154 54.462,27.204 45.362,27.229 50.962,27.229 42.562,27.354 39.762,27.404 41.112,27.404 11.812,27.504 6.912,27.604 11.812,28.204 6.925,28.369 1.562,28.404 2.762,28.404 3.912,28.404 4.912,28.404 6.112,28.404 54.462,28.404 11.812,28.704 0.362,28.799 2.212,29.004 3.362,29.004 4.362,29.004 5.512,29.004 46.612,29.554 1.562,29.604 2.762,29.604 3.912,29.604 4.912,29.604 6.112,29.604 54.462,29.604 15.562,29.754 16.562,29.754 17.562,29.754 18.562,29.754 19.562,29.754 0.362,29.804 46.612,30.654 15.562,30.754 16.562,30.754 17.562,30.754 18.562,30.754 19.562,30.754 54.462,30.804 15.562,31.754 16.562,31.754 17.562,31.754 18.562,31.754 19.562,31.754 39.212,32.004 40.212,32.004 41.212,32.004 42.212,32.004 43.212,32.004 0.362,32.103 0.655,32.712 54.166,32.712 15.562,32.754 16.562,32.754 17.562,32.754 18.562,32.754 19.562,32.754 2.362,33.001 39.212,33.004 40.212,33.004 41.212,33.004 42.212,33.004 43.212,33.004 51.409,33.004 52.434,33.004 53.459,33.004 4.387,33.146 50.422,33.148 23.462,33.554 23.962,33.554 49.553,33.556 5.328,33.596 15.562,33.754 42.212,34.004 43.212,34.004 23.462,34.054 23.962,34.054 48.604,34.489 6.261,34.546 28.693,34.543 27.662,34.554 42.212,35.004 43.212,35.004 6.668,35.415 48.154,35.429 11.387,36.004 42.212,36.004 43.212,36.004 6.812,36.401 48.009,36.404 11.387,36.504 11.387,37.204 6.812,37.426 48.009,37.454 13.612,37.504 14.112,37.504 14.812,37.504 15.312,37.504 22.312,37.504 23.512,37.504 11.387,37.704 6.812,38.451 48.009,38.454 7.105,39.158 47.719,39.162 9.012,39.454 10.212,39.454 11.412,39.454 12.612,39.454 13.812,39.454 15.012,39.454 16.212,39.454 17.412,39.454 18.612,39.454 19.812,39.454 21.012,39.454 22.212,39.454 23.412,39.454 24.612,39.454 25.812,39.454 27.412,39.454 29.012,39.454 30.212,39.454 31.412,39.454 32.612,39.454 33.812,39.454 35.012,39.454 36.212,39.454 37.412,39.454 38.612,39.454 39.812,39.454 41.012,39.454 42.212,39.454 43.412,39.454 44.612,39.454 45.812,39.454
  other v2: 16.312,1.171 14.212,4.046 16.012,4.046 18.412,4.046 20.212,4.046 27.162,4.254 28.762,4.254 30.362,4.254 31.962,4.254 33.562,4.254 35.162,4.254 36.762,4.254 38.362,4.254 27.162,5.854 28.762,5.854 30.362,5.854 31.962,5.854 33.562,5.854 35.162,5.854 36.762,5.854 38.362,5.854 27.162,7.454 28.762,7.454 30.362,7.454 31.962,7.454 33.562,7.454 35.162,7.454 36.762,7.454 27.162,9.054 28.762,9.054 30.362,9.054 31.962,9.054 33.562,9.054 35.162,9.054 36.762,9.054 43.762,16.179 49.362,16.179 43.762,24.629 49.362,24.629 17.9,25.3 19.767,25.304 16.817,25.954 17.917,26.454 25.762,27.424 40.462,29.154 43.462,29.154 44.062,29.154 33.562,30.754 30.512,30.854 36.362,31.254 33.562,31.654 46.062,32.254 36.362,32.754 46.062,32.854 32.362,34.654 33.062,34.654 33.762,34.654 46.062,34.654 36.362,35.254 32.362,35.354 33.062,35.354 33.762,35.354 20.012,35.854 32.362,36.054 33.062,36.054 33.762,36.054 36.362,36.754 46.032,37.054 38.362,38.854 38.962,38.854 41.912,38.854 42.512,38.854
  other v3: 10.212,4.904 23.512,6.069 24.362,6.069 11.332,6.284 45.6,6.4 41.362,8.104 13.112,8.354 40.912,8.504 41.362,8.504 17.012,8.604 17.837,8.604 18.662,8.604 19.487,8.604 20.312,8.604 21.137,8.604 21.962,8.604 22.787,8.604 23.612,8.604 40.912,8.954 31.762,9.304 17.012,9.429 17.837,9.429 18.662,9.429 19.487,9.429 20.312,9.429 21.137,9.429 21.962,9.429 22.787,9.429 23.612,9.429 17.012,10.254 17.837,10.254 18.662,10.254 19.487,10.254 20.312,10.254 21.137,10.254 21.962,10.254 22.787,10.254 23.612,10.254 26.312,14.515 38.05,34.65 39.25,34.65 14.627,35.544 15.502,35.544 21.902,35.544 23.102,35.544 20.302,35.744 42.912,36.454 39.3,37.2 14.627,38.254 20.702,38.254 35.177,38.254
  other v4: 11.312,30.154
  other v6: 33.712,8.654 35.662,8.654
  other v7: 7.501,17.661 8.08,18.227 4.128,18.389 4.938,18.389 5.748,18.389 6.558,18.41 3.32,18.44 7.222,18.874 8.4,18.971 9.256,18.97 7.378,19.669 8.446,19.78 9.256,19.78 7.378,20.479 8.446,20.59 9.256,20.59 7.378,21.289 8.446,21.4 9.256,21.4 7.378,22.099 8.446,22.21 9.256,22.21 7.378,22.909 8.446,23.02 9.256,23.02 7.378,23.719 8.446,23.83 9.256,23.83 7.378,24.529 8.446,24.64 9.256,24.64 7.378,25.339 8.446,25.45 9.256,25.45 7.378,26.149 8.446,26.26 9.256,26.26 7.378,26.959 8.446,27.07 9.256,27.07 7.378,27.769 8.446,27.88 9.256,27.88 7.378,28.579 8.446,28.69 9.256,28.69 7.372,29.389 8.437,29.5 9.247,29.5 4.726,29.989 7.021,30.119 8.224,30.281 9.237,30.31 5.441,30.37 6.251,30.37 7.729,30.922 8.539,30.932 9.228,31.12 7.026,31.325 5.414,31.439 6.224,31.439 7.803,31.564 8.578,31.634 4.707,31.833 3.936,31.868 9.203,32.214 5.414,32.249 6.224,32.249 7.034,32.249 7.844,32.249
GPIO_VREF: C45.1 C46.1 C47.1 C48.1 C106.1 C107.1 C197.1 J3.78 Q7.1 R171.2 R172.2 R173.2 U2.AA11 U2.AA14 U2.Y11 U3.1 U3.12 U18.1 U18.5 U22.A2 | length 66.8
  Top Layer w0.2: v1(28.062,30.054) 28.752,30.054 28.812,30.114 U3.1@28.812,30.154 U3.12@28.812,30.854
  Layer 5 w0.2: v6(10.812,4.204) 10.812,4.754 9.032,6.534 v6(9.032,7.004) 9.032,7.424 10.362,8.754 10.362,23.354 7.462,26.254 7.462,28.849 7.262,29.049 7.262,38.404 7.862,39.004 8.912,39.004 9.412,38.504 9.862,38.504 10.412,39.054 17.862,39.054 18.112,38.804 18.112,38.222 18.329,38.004 18.812,38.004 19.062,37.754 19.062,36.704 v6(19.462,36.304)
  Layer 7 w0.3: v6(9.032,7.004) v5(9.032,7.534) ; v6(10.812,4.204) v5(10.812,4.714)
  Layer 8 w0.3: v5(9.032,7.534) v3(9.472,7.534) ; v5(10.812,4.714) v3(10.812,5.154)
  Bottom Layer w0.15: Q7.1@9.652,6.934 9.652,7.095 9.494,7.253 9.494,7.513 v3(9.472,7.534) 9.494,7.556 9.494,7.816 9.612,7.935 10.853,7.935 11.15,8.232 11.15,10.212 11.238,10.3 11.6,10.3 U22.A2@11.6,9.6
  Bottom Layer w0.2: U18.1@9.612,3.804 9.612,3.794 9.512,3.694 9.412,3.694 9.272,3.554 C197.1@8.962,3.554 8.604,3.554 8.487,3.672 R172.2@8.487,4.739 8.487,5.204 8.687,5.404 10.562,5.404 v3(10.812,5.154) U18.5@10.812,4.804
  other v1: 33.262,23.404 33.762,23.404 34.262,23.404
  other v3: 19.502,35.544 19.512,36.004
  other v5: 19.912,35.554 19.912,36.004
iMX8_PWM1: R35.2 U2.AC18 | length 0.9
  Bottom Layer w0.1: R35.2@30.762,24.904 30.762,24.554 30.912,24.404 v1(31.262,24.404)
iMX8_PWM2: R32.2 U2.AD18 | length 2.4
  Bottom Layer w0.12: v1(31.262,24.904) 31.762,25.404 31.762,26.404 31.512,26.654 R32.2@31.512,26.954
iMX8_PWM3: R33.2 U2.AE18 | length 1.7
  Bottom Layer w0.12: R33.2@30.862,26.904 30.862,26.104 31.262,25.704 v1(31.262,25.404)
iMX8_PWM4: R31.2 U2.AJ20 | length 2.9
  Top Layer w0.1: v3(30.262,27.404) 30.512,27.654 30.512,27.904 30.612,28.004 v2(30.847,28.004)
  Layer 1 w0.1: v2(30.847,28.004) v4(30.847,28.354)
  Layer 2 w0.1: v4(30.847,28.354) 30.854,28.354 31.154,28.054 v6(31.162,28.054)
  Layer 7 w0.1: v5(30.573,27.716) v6(31.162,28.054)
  Layer 8 w0.12: v3(30.262,27.404) v5(30.573,27.716)
LVDS0_CLK_N: U2.G28 U16.25 | length 22.3
  Top Layer w0.08: 25.462,15.664 25.467,15.659 25.864,15.659 26.017,15.813 26.017,16.009 26.244,16.236 26.244,16.386 U2.G28@26.262,16.404
  Top Layer w0.1: v1(17.012,13.404) 18.024,13.404 18.174,13.554 22.312,13.554 24.422,15.664 25.462,15.664
  Bottom Layer w0.1: v1(17.012,13.404) 16.971,13.446 16.971,13.658 16.842,13.787 16.842,14.06 17.287,14.504 18.862,14.504 19.062,14.704 19.062,15.104 18.912,15.254 17.162,15.254 17.062,15.154 15.762,13.854 15.762,13.28 16.057,12.984 16.507,12.984 17.052,12.44 17.052,11.943 17.173,11.822 17.484,11.822 17.677,11.629 17.677,11.413 17.812,11.278 U16.25@17.812,11.054
LVDS0_CLK_P: U2.F29 U16.24 | length 22.1
  Top Layer w0.08: 25.462,15.894 25.752,15.894 U2.F29@25.762,15.904
  Top Layer w0.1: v1(17.412,13.754) 17.47,13.697 17.75,13.697 17.812,13.634 17.929,13.634 18.079,13.784 22.217,13.784 24.327,15.894 25.462,15.894
  Bottom Layer w0.1: U16.24@17.312,11.054 17.312,11.278 17.447,11.413 17.447,11.533 17.389,11.592 17.078,11.592 16.822,11.848 16.822,12.344 16.412,12.754 15.962,12.754 15.532,13.184 15.532,13.95 16.737,15.154 17.067,15.484 19.007,15.484 19.292,15.2 19.292,14.609 18.957,14.274 18.562,14.274 18.512,14.274 18.442,14.204 18.442,13.991 18.372,13.921 18.162,13.921 18.092,13.991 18.092,14.204 18.022,14.274 17.712,14.274 17.382,14.274 17.072,13.965 17.072,13.882 17.159,13.796 17.371,13.796 v1(17.412,13.754)
LVDS0_TX0_N: U2.E28 U16.29 | length 23
  Top Layer w0.08: 25.462,14.664 25.467,14.659 25.864,14.659 26.017,14.813 26.017,15.009 26.244,15.236 26.244,15.386 U2.E28@26.262,15.404
  Top Layer w0.1: v1(20.331,11.935) 20.582,12.186 20.699,12.186 20.867,12.354 21.195,12.354 21.332,12.217 21.332,11.622 21.145,11.434 19.417,11.434 19.032,11.05 19.032,9.459 19.467,9.024 24.757,9.024 25.13,9.397 25.13,10.937 24.682,11.384 24.082,11.384 23.742,11.724 23.742,13.069 23.997,13.324 24.832,13.324 25.195,13.687 25.195,14.522 25.337,14.664 25.462,14.664
  Bottom Layer w0.1: U16.29@19.812,11.054 19.812,11.278 19.677,11.413 19.677,12.019 19.796,12.139 20.089,12.139 20.292,11.935 v1(20.331,11.935)
LVDS0_TX0_P: U2.D29 U16.28 | length 22.8
  Top Layer w0.08: 25.462,14.894 25.752,14.894 U2.D29@25.762,14.904
  Top Layer w0.1: v1(20.312,12.504) 20.393,12.504 20.482,12.416 20.604,12.416 20.772,12.584 21.29,12.584 21.562,12.313 21.562,11.526 21.24,11.204 19.512,11.204 19.262,10.954 19.262,9.554 19.562,9.254 24.662,9.254 24.9,9.492 24.9,10.842 24.587,11.154 23.987,11.154 23.512,11.629 23.512,13.165 23.902,13.554 24.062,13.554 24.142,13.554 24.212,13.624 24.212,13.836 24.282,13.906 24.492,13.906 24.562,13.836 24.562,13.624 24.632,13.554 24.737,13.554 24.962,13.78 24.965,13.782 24.965,14.617 25.242,14.894 25.462,14.894
  Bottom Layer w0.1: U16.28@19.312,11.054 19.312,11.278 19.447,11.413 19.447,12.115 19.701,12.369 20.137,12.369 20.273,12.504 v1(20.312,12.504)
LVDS0_TX1_N: U2.F28 U16.27 | length 23.4
  Top Layer w0.08: 25.462,15.164 25.467,15.159 25.864,15.159 26.017,15.313 26.017,15.509 26.244,15.736 26.244,15.886 U2.F28@26.262,15.904
  Top Layer w0.1: v1(18.512,12.404) 18.512,12.453 18.352,12.613 18.352,12.896 18.411,12.954 21.762,12.954 22.162,12.554 22.162,11.154 21.742,10.734 20.567,10.734 20.282,10.45 20.282,9.959 20.567,9.674 24.199,9.674 24.392,9.868 24.392,10.47 24.127,10.734 23.482,10.734 23.062,11.154 23.062,13.404 24.822,15.164 25.462,15.164
  Bottom Layer w0.1: v1(18.512,12.404) 18.512,12.356 18.352,12.196 18.352,12.06 18.677,11.735 18.677,11.413 18.812,11.278 U16.27@18.812,11.054
LVDS0_TX1_P: U2.E29 U16.26 | length 23.2
  Top Layer w0.08: 25.462,15.394 25.752,15.394 U2.E29@25.762,15.404
  Top Layer w0.1: v1(17.962,12.404) 17.962,12.453 18.122,12.613 18.122,12.991 18.316,13.184 21.857,13.184 22.392,12.65 22.392,11.059 21.837,10.504 20.662,10.504 20.512,10.354 20.512,10.054 20.662,9.904 24.104,9.904 24.162,9.963 24.162,10.374 24.032,10.504 23.387,10.504 22.832,11.059 22.832,13.5 22.923,13.59 22.958,13.626 22.958,13.725 22.955,13.728 22.955,13.827 23.103,13.975 23.202,13.975 23.206,13.972 23.305,13.972 23.453,14.121 23.453,14.22 23.45,14.223 23.45,14.322 23.598,14.47 23.697,14.47 23.701,14.467 23.8,14.467 23.948,14.616 23.948,14.715 23.945,14.718 23.945,14.817 24.093,14.965 24.192,14.965 24.196,14.962 24.295,14.962 24.4,15.067 24.727,15.394 25.462,15.394
  Bottom Layer w0.1: v1(17.962,12.404) 17.962,12.356 18.122,12.196 18.122,11.964 18.447,11.639 18.447,11.413 18.312,11.278 U16.26@18.312,11.054
LVDS0_TX2_N: U2.H28 U16.23 | length 23.2
  Top Layer w0.08: 25.462,16.164 25.467,16.159 25.864,16.159 26.017,16.313 26.017,16.509 26.244,16.736 26.244,16.886 U2.H28@26.262,16.904
  Top Layer w0.1: v1(15.912,12.404) 15.912,12.486 15.752,12.646 15.752,12.729 15.811,12.787 16.98,12.787 17.312,12.454 17.312,12.004 17.462,11.854 17.462,11.613 17.404,11.554 16.287,11.554 15.937,11.904 15.162,11.904 14.717,12.35 14.717,12.884 14.957,13.124 15.132,13.124 15.487,13.479 15.637,13.479 15.746,13.371 15.829,13.371 15.921,13.463 15.921,13.546 15.787,13.679 15.787,13.779 16.162,14.154 16.612,14.154 16.712,14.054 16.712,13.904 16.812,13.804 17.004,13.804 17.062,13.863 17.062,14.054 17.162,14.154 21.912,14.154 23.922,16.164 25.462,16.164
  Bottom Layer w0.1: v1(15.912,12.404) 15.912,12.356 15.752,12.196 15.752,12.043 15.811,11.984 16.317,11.984 16.677,11.624 16.677,11.413 16.812,11.278 U16.23@16.812,11.054
LVDS0_TX2_P: U2.G29 U16.22 | length 23.1
  Top Layer w0.08: 25.462,16.394 25.752,16.394 U2.G29@25.762,16.404
  Top Layer w0.1: v1(15.362,12.404) 15.362,12.453 15.522,12.613 15.522,12.824 15.716,13.017 17.075,13.017 17.542,12.55 17.542,12.1 17.692,11.95 17.692,11.518 17.499,11.324 16.192,11.324 15.842,11.674 15.067,11.674 14.487,12.254 14.487,12.979 14.862,13.354 15.037,13.354 16.067,14.384 21.817,14.384 23.827,16.394 25.462,16.394
  Bottom Layer w0.1: v1(15.362,12.404) 15.362,12.356 15.522,12.196 15.522,11.948 15.716,11.754 16.221,11.754 16.447,11.529 16.447,11.413 16.312,11.278 U16.22@16.312,11.054
LVDS0_TX3_N: U2.J28 U16.20 | length 18.9
  Top Layer w0.08: 25.297,16.984 25.462,17.149 26.007,17.149 U2.J28@26.262,17.404
  Top Layer w0.1: v1(14.337,13.829) 14.337,13.878 14.497,14.038 14.497,14.339 15.112,14.954 21.437,14.954 23.467,16.984 25.297,16.984
  Bottom Layer w0.1: v1(14.337,13.829) 14.337,13.781 14.497,13.621 14.497,10.384 15.067,9.814 15.458,9.814 15.579,9.814 15.714,9.679 U16.20@15.937,9.679
LVDS0_TX3_P: U2.H29 U16.21 | length 19
  Top Layer w0.08: 25.462,16.824 25.557,16.919 25.747,16.919 U2.H29@25.762,16.904
  Top Layer w0.1: v1(14.887,13.829) 14.887,13.878 14.727,14.038 14.727,14.244 15.207,14.724 21.532,14.724 21.662,14.854 21.862,14.854 21.962,14.954 21.962,15.154 22.112,15.304 22.312,15.304 22.412,15.404 22.412,15.604 22.512,15.704 22.712,15.704 22.812,15.804 22.812,16.004 22.912,16.104 23.112,16.104 23.212,16.204 23.212,16.404 23.562,16.754 25.392,16.754 25.462,16.824
  Bottom Layer w0.1: v1(14.887,13.829) 14.887,13.781 14.727,13.621 14.727,12.353 14.727,11.994 14.797,11.924 14.993,11.924 15.063,11.854 15.063,11.644 14.993,11.574 14.797,11.574 14.727,11.504 14.727,11.294 14.797,11.224 14.993,11.224 15.063,11.154 15.063,10.944 14.993,10.874 14.797,10.874 14.727,10.804 14.727,10.479 14.802,10.404 15.162,10.044 15.363,10.044 15.579,10.044 15.714,10.179 U16.21@15.937,10.179
LVDS/DSI_SEL: R148.2 TP94.TP U2.E8 U16.17 | length 51.1
  Layer 1 w0.12: v2@36.262,15.404 36.496,15.404 36.65,15.25 v4(36.65,14.7)
  Layer 2 w0.1: v1(12.412,7.454) 12.162,7.204 12.162,3.004 13.612,1.554 14.212,1.554 14.512,1.854 16.362,1.854 16.712,1.504 31.362,1.504 32.912,3.054 33.462,3.054 v6(34.162,3.754)
  Layer 2 w0.12: v6(36.562,15.354) 36.562,15.279 36.65,15.191 v4(36.65,14.7)
  Layer 7 w0.1: v6(34.162,3.754) 34.162,5.054 34.412,5.304 36.862,5.304 37.212,5.654 37.212,8.338 37.012,8.538 37.012,9.373 36.607,9.778 36.607,10.757 36.712,10.862 36.712,11.515 36.712,12.888 36.496,13.104 36.35,13.25 36.35,13.95 36.65,14.25 v4(36.65,14.7) 36.562,14.788 v6(36.562,15.354)
  Bottom Layer w0.1: v1(12.412,7.454) 12.437,7.479 12.437,8.029 TP94.TP@12.462,8.054 12.57,8.054 12.77,7.854 R148.2@13.112,7.854 13.112,7.304 13.662,6.754 15.912,6.754 16.312,7.154 U16.17@16.312,7.804
  other v2: 36.262,15.404
MOD_ANT: U10.22 U11.5 | length 1.6
  Top Layer w0.12: U10.22@2.962,15.879 2.962,16.584 cw(c3.133,16.584) 3.012,16.704 ccw(c2.891,16.825) 3.062,16.825 U11.5@3.062,17.454
NetANT1_2: ANT1.2 C171.1
NetANT1_3: ANT1.3 C173.1 C174.1
NetANT1_4: ANT1.4 C171.2 C172.1
NetANT1_5: ANT1.5 C168.2
NetC23_1: C23.1 TP17.TP U1.2
  other v1: 14.912,26.649
NetC31_1: C31.1 TP19.TP U1.1 | length 0.8
  Bottom Layer w0.2: TP19.TP@13.662,27.254 13.72,27.197 13.72,27.042 v1(14.112,26.649)
NetC193_1: C193.1 L12.2 TP95.TP U17.11 U17.18 | length 14.7
  Top Layer w0.1: U17.11@34.512,34.554 34.643,34.554 34.689,34.508 34.689,34.378 34.812,34.254 34.812,33.704 34.982,33.534 v1(35.612,33.534)
  Top Layer w0.2: L12.2@32.932,38.604 32.952,38.585 33.282,38.585 33.562,38.304 v2(33.562,37.704) 33.397,37.539 33.072,37.539 C193.1@33.037,37.504 33.062,37.479 U17.18@33.062,36.804
  Layer 1 w0.12: v4(33.062,38.254) 33.062,38.229 33.562,37.729 v2(33.562,37.704)
  Layer 2 w0.1: v4(33.062,38.254) 33.084,38.254 33.334,38.504 v6(33.412,38.504)
  Layer 7 w0.2: v6(33.412,38.504) 33.812,38.104 34.312,38.104 34.762,38.554 35.362,38.554 35.662,38.254 35.662,35.854 35.262,35.454 35.262,34.839 35.582,34.519 35.797,34.519 36.012,34.304 36.012,33.869 35.778,33.634 35.766,33.634 35.666,33.534 v1(35.612,33.534)
  Bottom Layer w0.2: v1(35.612,33.534) 35.647,33.534 36.077,33.104 TP95.TP@36.112,33.104
NetC194_1: C194.1 L11.2 TP96.TP U17.12 | length 2.4
  Top Layer w0.2: U17.12@34.512,34.954 34.812,34.954 34.977,35.119 35.177,35.119 C194.1@35.212,35.154 L11.2@35.212,34.574 35.257,34.574 35.272,34.589 35.608,34.589 35.692,34.673 35.719,34.7 TP96.TP@35.8,34.7 35.8,34.781 35.7,34.881 35.7,34.966 v1(35.662,35.004)
  Bottom Layer w0.2: v1(35.662,35.004) v1@35.7,34.966
NetD2_1: D2.1 D11.1 J3.92 TP101.TP | length 27.6
  Top Layer w0.12: v2(29.85,33) 29.87,33 30.015,33.145 30.345,33.145 D11.1@30.4,33.2 ; D11.1@30.55,33.2 30.55,33.175 30.615,33.11 30.64,33.11 30.8,32.95 D2.1@31.35,32.95
  Layer 1 w0.12: v2(29.85,33) 29.886,32.964 29.886,32.88 v4(30.112,32.654)
  Layer 2 w0.1: v6(17.512,33.704) 17.812,33.404 19.462,33.404 20.112,34.054 21.662,34.054 22.062,34.454 22.062,34.804 22.562,35.304 24.912,35.304 25.329,34.888 25.479,34.888 25.912,34.454 25.912,34.004 26.812,33.104 27.362,33.104 27.507,32.959 28.107,32.959 28.562,32.504 29.409,32.504 29.559,32.654 v4(30.112,32.654)
  Layer 7 w0.1: v5(16.702,34.504) 16.707,34.504 17.507,33.704 v6(17.512,33.704)
  Layer 8 w0.12: v5(16.702,34.504) v3(16.702,34.944)
  Bottom Layer w0.1: TP101.TP@12.112,32.904 12.712,32.904 12.962,33.154 12.962,34.254 13.412,34.704 14.004,34.704 14.062,34.763 14.062,35.854 14.462,36.254 15.762,36.254 16.012,36.504 16.562,36.504 16.702,36.364 J3.92@16.702,35.544
  Bottom Layer w0.12: v3(16.702,34.944) J3.92@16.702,35.544
NetD7_1: D7.1 R174.2 | length 1
  Bottom Layer w0.15: D7.1@8.402,7.134 9.012,7.134 9.102,7.044 R174.2@9.102,6.764
NetD11_2: D11.2 R154.1 | length 1.3
  Top Layer w0.1: R154.1@29.15,32.65 30.2,32.65 30.25,32.6 30.3,32.6 30.35,32.55 D11.2@30.35,32.5
NetJ6_2: J6.2 J6.7 R185.2 | length 1.3
  Bottom Layer w0.1: R185.2@38.392,10.005 38.392,10.02 38.512,10.14 J6.7@38.512,10.665 J6.2@38.512,11.245
NetL13_2: L13.2 U17.19 | length 0.8
  Top Layer w0.2: L13.2@32.437,37.484 32.437,37.459 32.497,37.399 32.522,37.399 32.662,37.259 U17.19@32.662,36.804
NetQ2_1: Q2.1 R151.2 | length 0.5
  Top Layer w0.1: Q2.1@35.537,38.229 35.537,37.729 R151.2@35.562,37.704
NetQ4_3: Q4.3 R158.1 R159.1 | length 1.3
  Top Layer w0.1: R159.1@25.353,34.669 R158.1@25.978,34.669 25.978,34.169 25.903,34.094 Q4.3@25.853,34.094
NetQ5_1: Q5.1 R161.2 | length 0.6
  Top Layer w0.1: Q5.1@25.678,32.194 25.678,31.594 R161.2@25.703,31.569
NetR8_2: R8.2 U20.3 | length 2.8
  Bottom Layer w0.1: U20.3@25.2,15 26.008,15 26.222,15.214 26.222,15.672 26.45,15.9 R8.2@27.35,15.9
NetR24_2: R24.2 U2.J26 | length 0.4
  Bottom Layer w0.2: v1(27.262,17.404) R24.2@27.262,17.854
NetR41_1: R41.1 U2.AJ28 | length 1.6
  Top Layer w0.1: v1(25.762,28.054) 26.243,27.574 26.243,27.424 U2.AJ28@26.262,27.404
  Bottom Layer w0.1: R41.1@25.562,27.404 25.562,27.773 25.762,27.973 v1(25.762,28.054)
NetR63_1: R63.1 U7.7 | length 1.5
  Top Layer w0.1: R63.1@31.262,31.854 31.347,31.769 31.4,31.769 31.662,31.507 31.662,31.313 32.021,30.954 U7.7@32.237,30.954
NetR112_1: R112.1 U20.1 | length 1.3
  Bottom Layer w0.1: R112.1@22.55,16.8 22.9,16.8 22.95,16.75 22.95,16.5 23.05,16.4 U20.1@23.55,16.4
NetR183_2: R183.2 U10.17 | length 2.2
  Bottom Layer w0.1: v1(5.962,15.879) 6.987,15.879 7.562,15.304 R183.2@7.912,15.304
NetR186_2: R186.2 U21.1 | length 1.4
  Bottom Layer w0.1: U21.1@40.35,34.6 40.9,34.6 41.2,34.9 R186.2@41.2,35.316
NetTP45_TP: TP45.TP U5.E9 | length 0.6
  Bottom Layer w0.15: v1(18.762,17.904) 18.81,17.952 18.915,17.952 19.167,18.204 TP45.TP@19.262,18.204
NetTP46_TP: TP46.TP U5.E10 | length 0.6
  Bottom Layer w0.15: v1(18.762,17.404) TP46.TP@19.212,16.954
NetTP47_TP: TP47.TP U5.F10 | length 0.6
  Bottom Layer w0.12: TP47.TP@17.912,16.904 17.912,16.979 18.262,17.329 v1(18.262,17.404)
NetTP48_TP: TP48.TP U5.K10 | length 0.6
  Bottom Layer w0.15: TP48.TP@15.812,16.954 v1(16.262,17.404)
NetTP92_TP: TP92.TP U17.1 | length 3.3
  Top Layer w0.1: TP92.TP@31.262,38.754 31.262,37.804 30.912,37.454 30.912,36.404 31.162,36.154 U17.1@31.612,36.154
NetTP93_TP: TP93.TP U17.17 | length 2.2
  Top Layer w0.1: U17.17@33.462,36.804 33.464,36.806 33.464,37.156 34.012,37.704 TP93.TP@34.012,38.754
nEXTRST: J3.100 R154.2 U12.12 | length 18.8
  Top Layer w0.1: R154.2@28.628,32.628 R154.2@28.653,32.603 ; U12.12@28.653,33.399 28.653,32.654 R154.2@28.678,32.628
  Layer 1 w0.12: v2@28.75,32.65 28.75,32.691 v4(28.955,32.896)
  Layer 2 w0.1: v6(16.112,33.754) 16.962,33.754 17.337,34.129 17.737,34.129 18.062,33.804 19.312,33.804 19.862,34.354 21.299,34.354 21.681,34.737 21.681,34.873 22.462,35.654 24.862,35.654 25.162,35.354 25.462,35.354 26.237,34.579 26.237,34.279 27.062,33.454 27.512,33.454 27.712,33.254 28.262,33.254 28.621,32.896 v4(28.955,32.896)
  Layer 7 w0.1: v5(15.102,34.504) 15.46,34.147 15.72,34.147 v6(16.112,33.754)
  Layer 8 w0.12: v5(15.102,34.504) v3(15.102,34.944)
  Bottom Layer w0.12: v3(15.102,34.944) J3.100@15.102,35.544
  other v2: 28.65,32.65
NOR_RST: R66.1 U6.A4 | length 0.4
  Bottom Layer w0.2: v1(13.012,9.904) 13.012,9.957 13.177,10.122 13.177,10.219 R66.1@13.212,10.254
P\W\R\_LED: J3.95 Q3.3 R155.2 | length 6.7
  Bottom Layer w0.1: R155.2@12.412,37.754 12.012,37.754 11.643,38.123 11.643,38.398 Q3.3@11.587,38.454 11.587,38.879 11.762,39.054 15.612,39.054 15.902,38.764 J3.95@15.902,38.254
PCIE_CLK_N: R141.1 R147.2 U2.E16 | length 22.5
  Bottom Layer w0.11: v1(32.262,15.404) 32.188,15.404 32.053,15.269 31.866,15.269 31.667,15.07 31.667,14.2 32.028,13.839 34.377,13.839 34.992,13.224 36.252,13.224 36.358,13.119 36.358,13.104
  Bottom Layer w0.13: R141.1@27.442,6.704 27.722,6.704 27.787,6.769 27.856,6.769 27.932,6.769 28.002,6.839 28.002,6.854 28.072,6.784 28.072,6.611 28.148,6.534 29.689,6.534 31.059,7.904 36.612,7.904 37.112,8.404 37.112,9.551 36.612,10.051 36.612,12.85 36.358,13.104
PCIE_CLK_P: R140.1 R146.2 U2.D16 | length 22.6
  Bottom Layer w0.11: v1(32.262,14.904) 32.188,14.904 32.053,15.039 31.962,15.039 31.897,14.975 31.897,14.296 32.123,14.069 34.472,14.069 35.087,13.454 36.347,13.454 36.521,13.281 36.535,13.281 36.712,13.104
  Bottom Layer w0.13: R140.1@27.442,6.104 27.722,6.104 27.787,6.039 27.856,6.039 27.932,6.039 28.002,5.969 28.002,5.954 28.072,6.024 28.072,6.198 28.158,6.284 29.792,6.284 31.162,7.654 36.716,7.654 37.362,8.301 37.362,9.654 36.862,10.154 36.862,12.954 36.712,13.104
PCIE_RESREF: R39.1 U2.F16 | length 1.2
  Bottom Layer w0.2: v1(32.262,15.904) 32.3,15.866 32.6,15.866 32.762,15.704 R39.1@32.762,15.054
PCIE_RX_N: R137.1 R143.2 U2.B14 | length 13.8
  Top Layer w0.08: U2.B14@33.262,13.904 33.512,13.654 33.512,13.104
  Top Layer w0.13: 33.512,13.104 33.512,12.581 33.588,12.504 34.261,12.504 v1(34.711,12.054)
  Bottom Layer w0.11: 33.939,13.181 34.016,13.104
  Bottom Layer w0.13: R137.1@27.442,9.704 27.722,9.704 27.787,9.769 27.856,9.769 27.932,9.769 28.002,9.839 R143.2@28.002,9.854 28.072,9.784 28.072,9.611 28.148,9.534 28.568,9.534 28.573,9.529 29.284,9.529 29.862,10.108 29.862,11.508 30.459,12.104 31.312,12.104 31.612,12.404 31.612,12.858 32.009,13.254 33.866,13.254 33.939,13.181 ; 34.016,13.104 34.561,12.559 34.561,12.266 34.711,12.116 v1(34.711,12.054)
PCIE_RX_P: R136.1 R142.2 U2.A14 | length 13.6
  Top Layer w0.08: 33.262,13.104 U2.A14@33.262,13.404
  Top Layer w0.13: 33.262,13.104 33.262,12.477 33.485,12.254 33.92,12.254 34.12,12.054 v1(34.161,12.054)
  Bottom Layer w0.13: R136.1@27.442,9.104 27.722,9.104 27.787,9.039 27.856,9.039 27.932,9.039 28.002,8.969 R142.2@28.002,8.954 28.072,9.024 28.072,9.198 28.148,9.274 28.568,9.274 28.573,9.279 29.387,9.279 30.112,10.004 30.112,10.554 30.262,10.704 30.262,10.904 30.112,11.054 30.112,11.404 30.562,11.854 31.416,11.854 31.862,12.301 31.862,12.754 32.112,13.004 32.462,13.004 32.907,13.004 32.983,12.928 32.983,12.495 33.059,12.419 33.287,12.419 33.363,12.495 33.363,12.928 33.44,13.004 33.612,13.004 33.762,13.004 34.311,12.455 34.311,12.266 34.161,12.116 v1(34.161,12.054)
PCIEC_TX_C_N: C110.1 U2.B15 | length 2
  Top Layer w0.08: U2.B15@32.762,13.904 33.012,13.654 33.012,13.104
  Top Layer w0.13: 33.012,13.104 33.012,12.253 33.137,12.128 v1(33.137,12.054)
PCIEC_TX_C_P: C111.1 U2.A15 | length 1.6
  Top Layer w0.08: 32.648,13.104 32.739,13.196 32.739,13.382 U2.A15@32.762,13.404
  Top Layer w0.13: v1(32.587,12.054) 32.587,12.107 32.762,12.282 32.762,12.654 32.534,12.883 32.534,12.991 32.648,13.104
PCIEC_TX_N: C110.2 R139.1 R145.2 | length 8.6
  Bottom Layer w0.13: R139.1@27.442,7.604 27.722,7.604 27.787,7.539 27.856,7.539 27.932,7.539 28.002,7.469 28.002,7.454 28.072,7.524 28.072,7.698 28.148,7.774 28.903,7.774 28.908,7.779 29.787,7.779 31.012,9.004 31.012,10.354 31.512,10.854 32.741,10.854 32.987,11.101 32.987,11.408 33.063,11.484 33.092,11.484 C110.2@33.162,11.554
PCIEC_TX_P: C111.2 R138.1 R144.2 | length 8.5
  Bottom Layer w0.13: R138.1@27.442,8.204 27.722,8.204 27.787,8.269 27.856,8.269 27.932,8.269 28.002,8.339 28.002,8.354 28.072,8.284 28.072,8.111 28.148,8.034 28.889,8.034 28.894,8.029 29.684,8.029 30.762,9.108 30.762,10.458 30.91,10.606 30.91,10.803 31.039,10.931 31.235,10.931 31.409,11.104 31.55,11.104 31.615,11.104 31.691,11.181 31.691,11.235 31.767,11.311 31.995,11.311 32.071,11.235 32.071,11.181 32.147,11.104 32.262,11.104 32.637,11.104 32.737,11.204 32.737,11.408 32.661,11.484 32.632,11.484 C111.2@32.562,11.554